# Altium PCB Flasher_V1.PcbDoc
Units mil, origin at the board's own origin, x right, y up, seen from the top; angles counter-clockwise.
Board outline 715 x 955 mil, 2 copper layers (Component Side, Bottom Layer), stack 62.8 mil thick; 11 components, 12 nets, 53 pads, 33 vias.
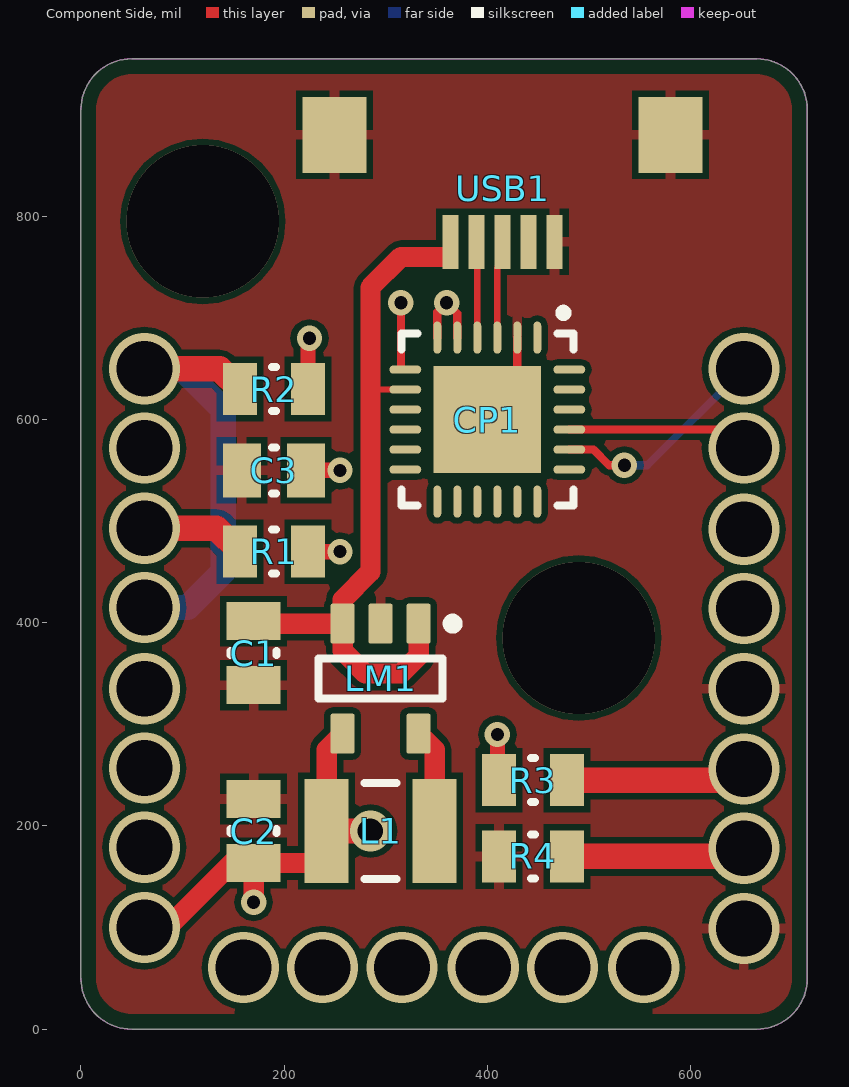
[diagram p0: Component Side view]
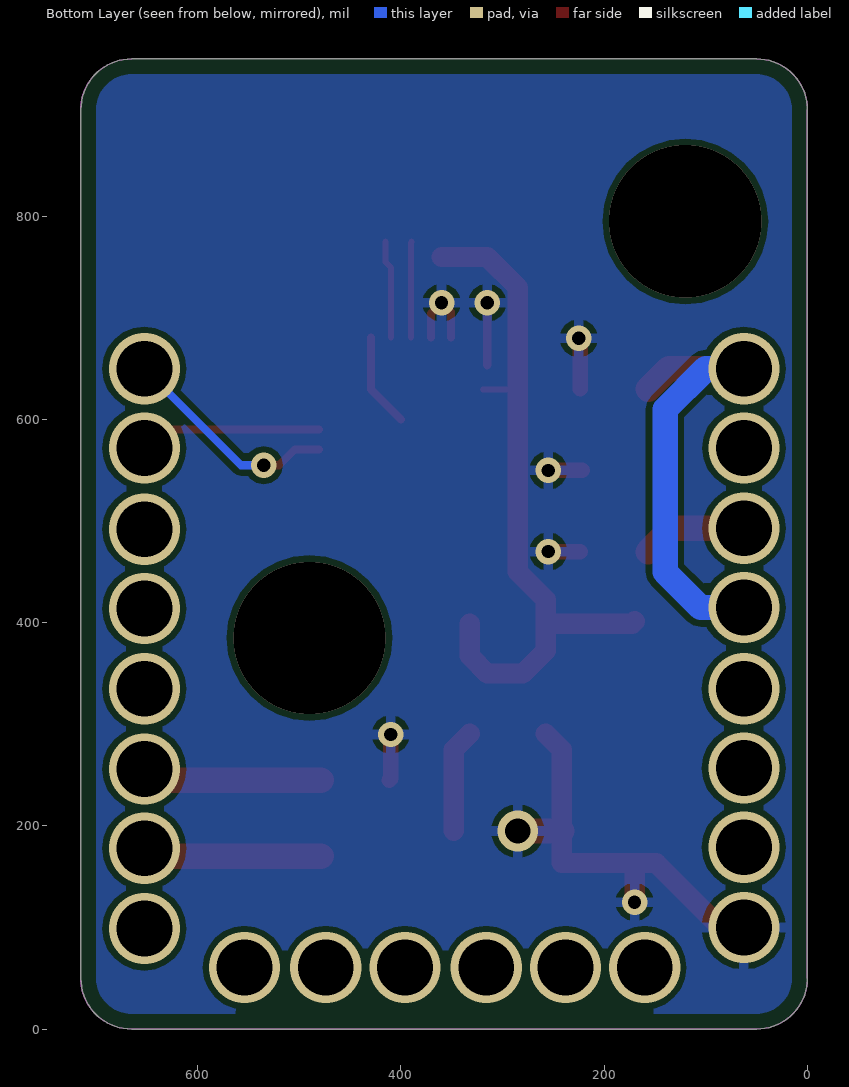
[diagram p1: Bottom Layer view, seen from below]

## Layer stack, top to bottom
Top Solder: solder mask 0.4, Solder Resist, Dk 3.5
Component Side: signal copper 1.4
Dielectric 1: core 60, FR-4, Dk 4.2
Bottom Layer: signal copper 1.4
Solder Side: solder mask 0.4, Solder Resist, Dk 3.5

## Board outline
0,50 0,905 cw(c50,905) 50,955 665,955 cw(c665,905) 715,905 715,50 cw(c665,50) 665,0 50,0 cw(c50,50)

## Design rules (kind name [scope] priority, off if disabled: settings)
BoardOutlineClearance [All] p1: gap=15
Clearance [All] p1: gap=6
ComponentClearance ComponentClearance_ESP [InComponent('ESP-1')] p1: gap=0 collisioncheckmode=3 verticalgap=0 showdistances=FALSE
ComponentClearance [All] p2: gap=10 collisioncheckmode=3 verticalgap=10 showdistances=FALSE
HoleSize [All] p1: absolutevalues=TRUE maxlimit=500 minlimit=13 maxpercent=80.000 minpercent=20.000
MinimumSolderMaskSliver [All] p1: minsoldermaskwidth=0
PlaneConnect [All] p1: planeconnectstyle=Relief reliefexpansion=20 reliefentries=4 reliefconductorwidth=10 reliefairgap=6
PolygonConnect [All] p1: connectstyle=Relief reliefconductorwidth=10 reliefentries=4 polygonreliefangle="90 Angle" airgapwidth=6
RoutingVias [All] p1: holewidth=28 width=50 viastyle="Through Hole" minholewidth=13 minwidth=25 maxholewidth=50 maxwidth=100
SilkToSilkClearance [All] p1: silktosilkclearance=0
SilkToSolderMaskClearance [IsPad] p1: minsilkscreentomaskgap=0 clearancetoexposedcopper=TRUE
SolderMaskExpansion [All] p1: expansion=0
Width [All] p1: maxlimit=100 minlimit=6 preferedwidth=10
24 further rules are at their usual default settings.

## Classes and differential pairs
component class WIFI: ESP8266 R1 R2 R3 R4
component class Power: C1 C2 C3 CP1 L1 LM1 U2 USB1

## Components (designator, comment, footprint, x,y, rotation, side; value= is the part's Value field where it differs from the comment)
C1 "4.7uF" CAPC0805(2012)145_L 170,370 r90 top
C2 "10uF" CAPC0805(2012)100_L 170,195 r270 top
C3 "100nF" CAPC0805(2012)100_L 190,550 r0 top
CP1 "USB to UART Bridge" PCBComponent#1 400,600 r270 top
L1 "BRL3225T2R2M" C1210_L 295,195 r180 top
LM1 "LM3671MF-3.3/NOPB" DBV0005A_N 295,345 r270 top
R1 "10K" RESC0805(2012)_L 190,470 r0 top
R2 "10K" RESC0805(2012)_L 190,630 r0 top
R3 "10K" RESC0805(2012)_L 445,245 r180 top
R4 "10K" RESC0805(2012)_L 445,170 r0 top
USB1 "USB3100-30-A Flipped USB" PCBComponent#2 415,775 r180 top

## Footprints (in the part's own frame and the unit in brackets; to place one, negate y for a bottom-side part, rotate by r counter-clockwise, add the part's x,y. Pads: shape width x height; smd on the part's side, far side on the other; paste and mask are expansions set on the pad)
C1210_L [mm] "Chip Capacitor, Body 3.2x2.5mm, IPC High Density"
  rect 1.1x2.6 smd: 1(-1.35,0) 2(1.35,0)
  silkscreen extent -0.4,-1.2 0.4,1.2, body extent -1.7,-1.35 1.7,1.35, height 1.5
CAPC0805(2012)100_L [mm] "Chip Capacitor, Body 2.0x1.2mm, Height 1.0mm, IPC High Density"
  rect 0.95x1.35 smd: 1(-0.8,0) 2(0.8,0)
  silkscreen extent -0.05,-0.58 0.05,0.58, body extent -1.1,-0.72 1.1,0.72, height 1
CAPC0805(2012)145_L [mm] "Chip Capacitor, Body 2.0x1.2mm, Height 1.45mm, IPC High Density"
  rect 0.95x1.35 smd: 1(-0.8,0) 2(0.8,0)
  silkscreen extent -0.05,-0.58 0.05,0.58, body extent -1.1,-0.72 1.1,0.72, height 1.45
DBV0005A_N [mm] "SOT23, 5-Leads, Body 3.05x1.75mm, Pitch 0.95mm, IPC Medium Density"
  rrect17% 1x0.6 smd: 1(-1.375,0.95) 2(-1.375,0) 3(-1.375,-0.95) 4(1.375,-0.95) 5(1.375,0.95)
  silkscreen extent -1.5,-1.55 0.5,1.93, body extent -1.42,-1.46 1.42,1.46, height 1.08
PCBComponent#1 [mm]
  oval 0.8x0.2 smd: 1(-2.05,1.25) 2(-2.05,0.75) 3(-2.05,0.25) 4(-2.05,-0.25) 5(-2.05,-0.75) 6(-2.05,-1.25) 13(2.05,-1.25) 14(2.05,-0.75) 15(2.05,-0.25) 16(2.05,0.25) 17(2.05,0.75) 18(2.05,1.25)
  oval 0.2x0.8 smd: 7(-1.25,-2.05) 8(-0.75,-2.05) 9(-0.25,-2.05) 10(0.25,-2.05) 11(0.75,-2.05) 12(1.25,-2.05) 19(1.25,2.05) 20(0.75,2.05) 21(0.25,2.05) 22(-0.25,2.05) 23(-0.75,2.05) 24(-1.25,2.05)
  rect 2.68x2.68 smd: 25(0,0)
  silkscreen extent -2.77,-2.15 2.15,2.15, body extent -2,-2 2,2, height 0.8
PCBComponent#2 [mm]
  rect 0.4x1.35 smd mask+0: 1(1.3,0) 2(0.65,0) 3(0,0) 4(-0.65,0) 5(-1.3,0)
  rect 1.6x1.9 smd mask+0: 6(-4.2,-2.675) 6(4.2,-2.675)
  body extent -4.61,-5.32 4.61,0.18, height 2.64
RESC0805(2012)_L [mm] "Chip Resistor, Body 2.0x1.3mm, IPC High Density"
  rect 0.85x1.3 smd: 1(-0.85,0) 2(0.85,0)
  silkscreen extent -0.05,-0.55 0.05,0.55, body extent -1.1,-0.67 1.1,0.68, height 0.7

## Part data
C1: library part CMP-1036-04884-1, "CAP 4.7uF 10V ±20% 0805 (2012 Metric) Thickness 1.45mm SMD"
C2: library part CMP-1036-04925-1, "CAP 10uF 10V ±20% 0805 (2012 Metric) Thickness 1mm SMD"
C3: library part CMP-1036-04394-1, "CAP 100nF 10V ±10% 0805 (2012 Metric) Thickness 1mm SMD"
CP1: library part CP2104-A.2, "USB to UART bridge"
L1: library part IND-BRL3225T2R2M-2, "INDUCTOR 2.2UH 1.85A 20% 1210 SM"
LM1: library part CMP-0063-01132-3, "2MHz, 600mA Step-Down DC-DC Converter, 5-pin SOT-23, Pb-Free"
R1 R2 R3 R4: library part CMP-1013-00098-1, "10K 0.125W 5% 0805 (2012 Metric)  SMD"
USB1: library part USB3100-30-A-A.1, "Flipped USB Connector, Micro USB Type B, USB 2.0, Receptacle, 5 Positions, Surface Mount, Right Angle"

## Via types
v1: diameter 70, hole 55, Component Side to Bottom Layer, 22 vias
v2: diameter 25, hole 13, Component Side to Bottom Layer, tented both sides, 8 vias
v3: diameter 150, hole 150, Component Side to Bottom Layer, 2 vias
v4: diameter 40, hole 25, Component Side to Bottom Layer, tented both sides, 1 vias

## Nets (pads, with @x,y where several pads share a name; then routed paths per layer and width w, separated by ;. In a path a pad name is that pad's centre, name@x,y a point inside that pad or via, vN(x,y) a via of type N, cw(c..) or ccw(c..) an arc to the next point about the centre after c; other vN are vias at no path point)
3V3: C2.2 C3.2 CP1.5 CP1.6 CP1.7 L1.2 LM1.4 R1.2 R2.2 R3.2 | length 720.7
  Component Side w8: 315,653.5 v2(315,715) ; CP1.6 350.79,705.79 v2(360,715) 370.47,704.53 CP1.5
  Component Side w15: C3.2 v2(255,550) ; R1.2 v2(255,470) ; R2.2 223.46,678.46 v2(225,680) ; v2(410,290) 410,246.54 R3.2
  Component Side w20: v1(62.5,100) 85,100 148.5,163.5 C2.2 ; v2(170,125) C2.2 ; LM1.4 241.85,275.12 L1.2 241.85,163.5 C2.2
  Component Side w25: L1.2 v4(285,195)
ENABLE: R1.1 | length 103.6
  Component Side w25: v1(62.5,493) 133.54,493 R1.1
GND: C1.1 C2.1 C3.1 CP1.2 CP1.25 LM1.2 R4.1 USB1.5 USB1.6 | length 92.9
  Component Side w8: CP1.25 429.53,629.53 CP1.2
  other v1: 652.5,99 652.5,335
GPIO2: R3.1 | length 178.6
  Component Side w25: R3.1 641.5,245 v1(652.5,256)
GPIO15: R4.2 | length 177.3
  Component Side w25: R4.2 644.5,170 v1(652.5,178)
RST: R2.1 | length 448.4
  Component Side w25: v1(62.5,650) 136.54,650 R2.1
  Bottom Layer w25: v1(62.5,415) 105,415 140,450 140,610 100,650 v1(62.5,650)
RX: CP1.21 | length 179.3
  Component Side w8: CP1.21 634.34,590.16 v1(652.5,572)
SW: L1.1 LM1.5 | length 102.4
  Component Side w20: LM1.5 348.15,275.12 L1.1
TX: CP1.20 | length 217.6
  Component Side w8: CP1.20 504.53,570.47 520,555 v2(535,555)
  Bottom Layer w8: v2(535,555) 557.5,555 v1(652.5,650)
USBD+: CP1.3 USB1.3 | length 96.4
  Component Side w6: CP1.3 409.84,749.84 415,755 USB1.3
USBD-: CP1.4 USB1.2 | length 94.6
  Component Side w6: USB1.2 390.16,774.25 CP1.4
VIN_USB: C1.2 CP1.8 LM1.1 LM1.3 USB1.1 | length 702.3
  Component Side w6: 285,629.53 CP1.8
  Component Side w20: C1.2 172.36,399.13 LM1.3 ; LM1.1 332.4,367.4 315,350 280,350 257.6,372.4 LM1.3 ; USB1.1@360,760 315,760 285,730 285,629.53 285,450 257.6,422.6 LM1.3
pads on no net: CP1.1 CP1.9 CP1.10 CP1.11 CP1.12 CP1.13 CP1.14 CP1.15 CP1.16 CP1.17 CP1.18 CP1.19 CP1.22 CP1.23 CP1.24 USB1.4
copper on no net:
  other v1: 160,60.5 238,60.5 316,60.5 396,60.5 474,60.5 554,60.5 62.5,179 62.5,257 62.5,335 652.5,414 652.5,492 62.5,572
  other v3: 490,385 120,795

## Polygon pours and split planes (outlines as drawn)
GND on Component Side "Top-GND" (solid, pour order 13): 0,50 0,905 cw(c50,905) 50,955 665,955 cw(c665,905) 715,905 715,50 cw(c665,50) 665,0 50,0 cw(c50,50)
3V3 on Bottom Layer "Bottom-3V3" (solid, pour order 14): 0,50 0,905 cw(c50,905) 50,955 665,955 cw(c665,905) 715,905 715,50 cw(c665,50) 665,0 50,0 cw(c50,50)

## Keep-outs
Keep-Out Layer:
  the board outline again, w1